# EAGLE board SparkFun_Color_Sensor_OPT4048_Mini (EAGLE 9.6.2)
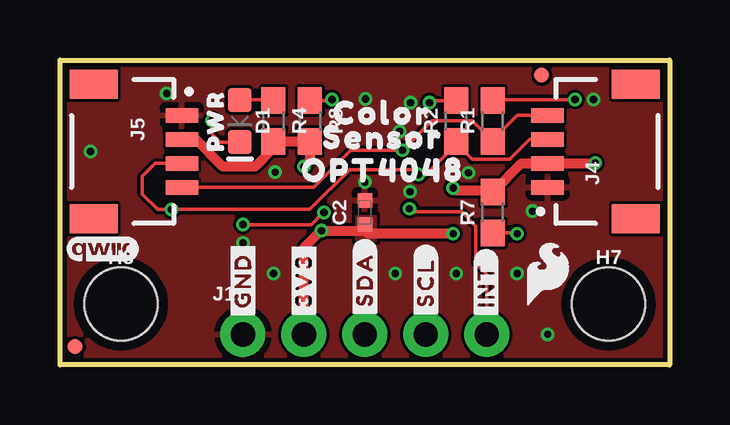
[diagram p0: board, top side]
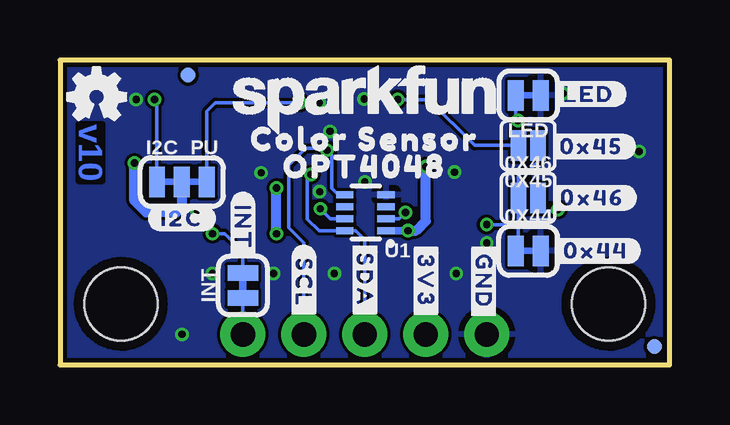
[diagram p1: board, bottom side, seen from below]

Size 25.4 x 12.7 mm. Coordinates in mm from the lower left corner, seen from the top.
Outline: 0,0 0,12.7 25.4,12.7 25.4,0 0,0
Copper layers (1*16): Top 0.035mm / dielectric 1.5mm / Bottom 0.035mm
Design rules "SparkFun-2-Layer-Minimum-JLCPCB": minimum track width 5mil, minimum drill 0.3mm, track to track 5mil, track to pad 5mil, pad to pad 5mil, via to via 5mil, smd to smd 5mil, copper to edge 7mil, drill to drill 7mil, minimum pad ring 5mil, minimum via ring 5mil, stop-mask expansion 2.5mil, vias tented up to drill 25mil, thermal gap 10mil

## Footprints (pad centres in the part's own frame; a part is rotated, then mirrored left to right if it is on the bottom)
SMT-JUMPER_2_NC_TRACE_SILK = smd 0.66 x 1.27: 1 -0.521,0; 2 0.521,0
SMT-JUMPER_2_NO_SILK = smd 0.635 x 1.27: 1 -0.406,0; 2 0.406,0
0402-TIGHT = smd 0.6 x 0.6: 1 -0.5,0; 2 0.5,0
LED-0603 = smd 1 x 1: A -0.877,0; C 0.877,0
FIDUCIAL-MICRO = smd 0.635 x 0.635: 1 0,0
STAND-OFF-TIGHT = hole 3.048: 0,0
SMT-JUMPER_3_2-NC_TRACE_SILK = smd 0.66 x 1.27: 1 -1.041,0; 2 0,0; 3 1.041,0
1X05_NO_SILK = drill 1.016 pad 1.88: 1 0,0; 2 2.54,0; 3 5.08,0; 4 7.62,0; 5 10.16,0
JST04_1MM_RA = smd 0.6 x 1.35: 1 -1.5,0; 2 -0.5,0; 3 0.5,0; 4 1.5,0 | smd 1.2 x 2: NC1 2.8,-3.675; NC2 -2.8,-3.675
0603 = smd 1.1 x 1: 1 -0.85,0; 2 0.85,0
FCSOT = smd 0.72 x 0.3: P1 -0.889,0.762; P2 -0.889,0.262; P3 -0.889,-0.238; P4 -0.889,-0.738; P5 0.831,-0.738; P6 0.831,-0.238; P7 0.831,0.262; P8 0.831,0.762

## Placement (x,y rotation side)
0X44  JUMPER-SMT_2_NC_TRACE_SILK  [SMT-JUMPER_2_NC_TRACE_SILK]  5.89,4.75 0 bottom
0X45  JUMPER-SMT_2_NO_SILK  [SMT-JUMPER_2_NO_SILK]  5.89,9.14 180 bottom
0X46  JUMPER-SMT_2_NO_SILK  [SMT-JUMPER_2_NO_SILK]  5.89,6.96 0 bottom
C2  0.1uF  [0402-TIGHT]  12.7,6.35 90 top
D1  RED  [LED-0603]  7.49,10.16 270 top
FD5  FIDUCIALUFIDUCIAL  [FIDUCIAL-MICRO]  20.07,12.06 0 bottom
FD6  FIDUCIALUFIDUCIAL  [FIDUCIAL-MICRO]  0.64,0.76 0 bottom
FD7  FIDUCIALUFIDUCIAL  [FIDUCIAL-MICRO]  0.64,0.76 0 top
FD8  FIDUCIALUFIDUCIAL  [FIDUCIAL-MICRO]  20.07,12.06 0 top
FRAME2  FRAME-LETTER  [CREATIVE_COMMONS]  -14.48,-16.76 0 top  (outside the outline)
H7  STAND-OFFTIGHT  [STAND-OFF-TIGHT]  22.86,2.54 0 top
H8  STAND-OFFTIGHT  [STAND-OFF-TIGHT]  2.54,2.54 0 top
I2C_PU  S_MODE  [SMT-JUMPER_3_2-NC_TRACE_SILK]  20.32,7.62 0 bottom
INT  JUMPER-SMT_2_NC_TRACE_SILK  [SMT-JUMPER_2_NC_TRACE_SILK]  17.78,3.3 90 bottom
J1  [1X05_NO_SILK]  7.62,1.27 0 top
J4  QWIIC_RIGHT_ANGLE  [JST04_1MM_RA]  20.32,8.89 90 top
J5  QWIIC_RIGHT_ANGLE  [JST04_1MM_RA]  5.08,8.89 270 top
LED  JUMPER-SMT_2_NC_TRACE_SILK  [SMT-JUMPER_2_NC_TRACE_SILK]  5.89,11.23 180 bottom
LOGO1  SFE_LOGO_NAMEBLANK  [BLANK]  -14.48,-16.76 0 top  (outside the outline)
LOGO2  QWIIC_LOGO_3MM  [QWIIC_3MM]  1.78,4.83 0 top
LOGO3  OSHW-LOGONO_SILK  [DUMMY]  -14.48,-16.76 0 top  (outside the outline)
LOGO4  SPECIAL_INSTRUCTIONS-ORDERING  [ORDERING_INSTRUCTIONS]  40.64,50.8 0 top  (outside the outline)
R1  2.2k  [0603]  18.03,10.16 90 top
R2  2.2k  [0603]  16.51,10.16 90 top
R4  4.7k  [0603]  8.89,10.16 270 top
R7  10k  [0603]  18.03,6.35 90 top
R8  10k  [0603]  10.41,10.16 270 top
U1  OPT4048  [FCSOT]  12.7,6.35 180 bottom
U$1  [#INT#9]  17.75,3.33 90 top
U$2  [COLOR_SENSOR227]  12.7,9.4 0 bottom
U$3  [OPT4048229]  12.7,8.26 0 bottom
U$4  [#0X44#11]  3.07,4.75 0 bottom
U$5  [#0X46#11]  3.23,6.96 0 bottom
U$6  [#0X45#11]  3.25,9.09 0 bottom
U$7  [#INT#3]  17.78,5.71 270 bottom
U$8  [SFE_LOGO_NAME_.1]  12.7,11.05 0 bottom
U$9  [COLOR14]  13.44,10.49 0 top
U$10  [#3V3#0]  10.16,3.51 270 bottom
U$11  [SENSOR15]  13.46,9.47 0 top
U$12  [OPT4048229]  13.46,8.1 0 top
U$13  [#SDA#1]  12.7,3.53 270 bottom
U$14  [#LED#11]  3.38,11.28 0 bottom
U$15  [OSHW-LOGO-MINI]  23.88,11.18 0 bottom
U$16  [#GND#4]  7.75,3.48 270 bottom
U$19  [#SCL#5]  15.24,3.43 270 bottom
U$20  [#I2C#11]  20.32,6.1 0 bottom
U$35  [SFE_LOGO_FLAME_.1]  20.32,3.81 0 top
U$37  [#3V3#0]  10.16,3.51 90 top
U$38  [#GND#4]  7.62,3.51 90 top
U$39  [#SCL#5]  15.24,3.43 90 top
U$40  [#SDA#6]  12.7,3.56 90 top
U$43  [PWR8821882023]  6.48,10.16 90 top

## Library data of the parts
0X44-0X46 I2C_PU INT LED = SparkFun-Jumpers
C2 = SparkFun-Capacitors; PROD_ID: CAP-12416
D1 = SparkFun-LED; PROD_ID: DIO-17976
FD5-FD8 FRAME2 LOGO1-LOGO4 U$8 U$15 U$35 = SparkFun-Aesthetics
H7 H8 = SparkFun-Hardware
J1 = SparkFun-Connectors
J4 J5 = SparkFun-Connectors; PROD_ID: CONN-13694
R1 R2 = SparkFun-Resistors; PROD_ID: RES-08272
R4 = SparkFun-Resistors; PROD_ID: RES-07857
R7 R8 = SparkFun-Resistors; PROD_ID: RES-00824
U1 = Color_Sensor; PROD_ID: IC-18868
U$1-U$3 U$12 = top_small
U$4-U$7 U$9 U$11 U$13 U$14 = bot_small
U$10 U$16 U$19 U$20 = TMFHQBotSilk
U$37-U$40 U$43 = TMFHQTopSilk

## Nets
3.3V: C2.1 I2C_PU.2 J1.2 J4.2 J5.2 R4.2 R7.2 R8.2 U1.P1
ADDR: 0X44.1 0X45.1 0X46.1 U1.P2
GND: 0X44.2 C2.2 J1.1 J4.1 J5.1 LED.1 U1.P4
INT: INT.1 J1.5 U1.P7
N$1: I2C_PU.1 R1.2
N$2: I2C_PU.3 R2.2
N$3: D1.A R4.1
N$4: D1.C LED.2
N$5: INT.2 R7.1
N$9: 0X45.2 R8.1
SCL: J1.4 J4.4 J5.4 R1.1 U1.P5
SDA: 0X46.2 J1.3 J4.3 J5.3 R2.1 U1.P8

## Tracks (layer width: path | path; a pad name or v marks a point on that pad's centre or on a via)
3.3V  (via drill 0.3)
  Top 0.406: J1.2 10.16,4.88 10.87,5.59 v10.9,5.59 12.84,5.59 12.84,5.46 v16.38,5.46 | R7.2 18.12,7.28 | 18.12,7.28 19.22,8.39 J4.2 22.28,8.39 v22.3,8.41 | v16.38,7.37 16.47,7.28 18.12,7.28 | v10.16,8.26 10.41,8.51 R8.2 R4.2 8.89,9.02 8.13,8.26 6.78,8.26 5.65,9.39 J5.2
  Bottom 0.305: U1.P1 v10.9,5.59
  Bottom 0.406: v16.38,5.46 v16.38,7.37 | I2C_PU.2 20.32,6.58 20.55,6.35 21.82,6.35 22.3,6.83 v22.3,8.41 | v10.9,5.59 10.57,5.59 10.16,5.99 v10.16,8.26
  pour Top (no thermals): 12.34,6.1 12.34,5.21 13.16,5.21 13.16,6.17 12.34,6.17 12.34,6.12
ADDR  (via drill 0.3)
  Top 0.152: v11,6.35 10.97,6.35 10.46,5.84 v7.62,5.84
  Bottom 0.152: U1.P2 11.26,6.09 v11,6.35 | 0X44.1 6.3,4.86 6.3,5.82 | 6.3,5.82 0X46.1 6.3,7.87 6.12,8.05 5.9,8.05 5.49,8.46 0X45.1 | v7.62,5.84 6.33,5.84 6.3,5.82
GND  (via drill 0.3)
  other vias: 13.97,3.81 8.89,3.81 7.62,5.08 14.61,10.92 22.23,11.05 17.02,8 14.58,7.21 14.15,9.73 1.27,8.89 20.32,1.27 12.73,11.07 16.51,3.81 19.05,3.81 12.7,7.62 4.45,11.3 19.68,6.4 8.97,8.03
  pour Top (rank 4): 0,12.7 25.4,12.7 25.4,0 0,0
  pour Bottom (rank 4): 0,12.7 25.4,12.7 25.4,0 0,0
INT  (via drill 0.3)
  Top 0.152: v14.55,6.5 14.68,6.38 16.74,6.38 17.33,5.78 17.33,4.23 17.78,3.78 J1.5
  Bottom 0.152: U1.P7 14.14,6.09 v14.55,6.5 | J1.5 INT.1
N$1  (via drill 0.3)
  Top 0.152: v21.46,11.05 18.07,11.05 R1.2
  Bottom 0.152: I2C_PU.1 21.36,10.95 v21.46,11.05
N$2  (via drill 0.3)
  Top 0.152: v15.39,10.92 15.48,11.01 R2.2
  Bottom 0.152: I2C_PU.3 19.28,10.57 18.92,10.92 v15.39,10.92
N$3
  Top 0.152: D1.A 8.89,11.04
  Top 0.406: 8.89,11.04 R4.1
N$4  (via drill 0.3)
  Top 0.152: v6.33,10.19 6.33,9.63 6.67,9.28 D1.C
  Bottom 0.152: LED.2 6.41,10.27 v6.33,10.19
N$5  (via drill 0.3)
  Top 0.152: R7.1 19.01,5.5 v19.05,5.46
  Bottom 0.152: INT.2 17.78,4.7 18.54,5.46 v19.05,5.46
N$9  (via drill 0.3)
  Top 0.152: v11.33,11.05 11.29,11.01 R8.1
  Bottom 0.152: v11.33,11.05 10.03,11.05 8.13,9.14 0X45.2
SCL  (via drill 0.3)
  Top 0.152: J4.4 19.05,10.39 18.82,10.16 18.03,9.37 R1.1 17.2,10.15 17.2,10.16 15.49,10.16 v14.28,8.94 12.12,8.94 10.56,7.39 J5.4
  Bottom 0.152: U1.P5 13.55,7.11 13.82,7.11 14.07,7.37 14.07,8.74 v14.28,8.94 14.35,9.02 15.16,9.02 15.88,8.31 15.88,5.71 15.24,5.08 15.24,2.54 J1.4
SDA  (via drill 0.3)
  Top 0.152: J4.3 19.58,9.39 18.75,8.56 17.17,8.56 16.51,9.22 R2.1 16.51,9.19 15.24,7.92 v14.94,7.92 14.73,8.13 12.06,8.13 10.41,6.48 v4.65,6.48 4.06,6.48 3.43,7.11 3.43,7.85 3.97,8.39 J5.3
  Bottom 0.152: v14.94,7.92 15.09,7.77 15.09,6.07 14.61,5.59 U1.P8 13.08,5.59 12.7,5.21 J1.3 | 0X46.2 5.49,6.55 5.33,6.4 4.72,6.4 v4.65,6.48

## Text on the board
Bottom: v10
Measures: Units in Inches
tDocu: 1.6mm Thickness / 1 oz. Copper / Lead-Free HASL finish / Material: TG135-140 / Red Soldermask / White Silkscreen | Elias Santistevan